# Altium PCB R100.230.040.001-00 Filtr1.PcbDoc
Units mm, origin at the board's own origin, x right, y up, seen from the top; angles counter-clockwise.
Board outline 163 x 157 mm, 2 copper layers (Top, Bottom), stack 2.14 mm thick; 16 components, 6 nets, 50 pads, 528 vias.
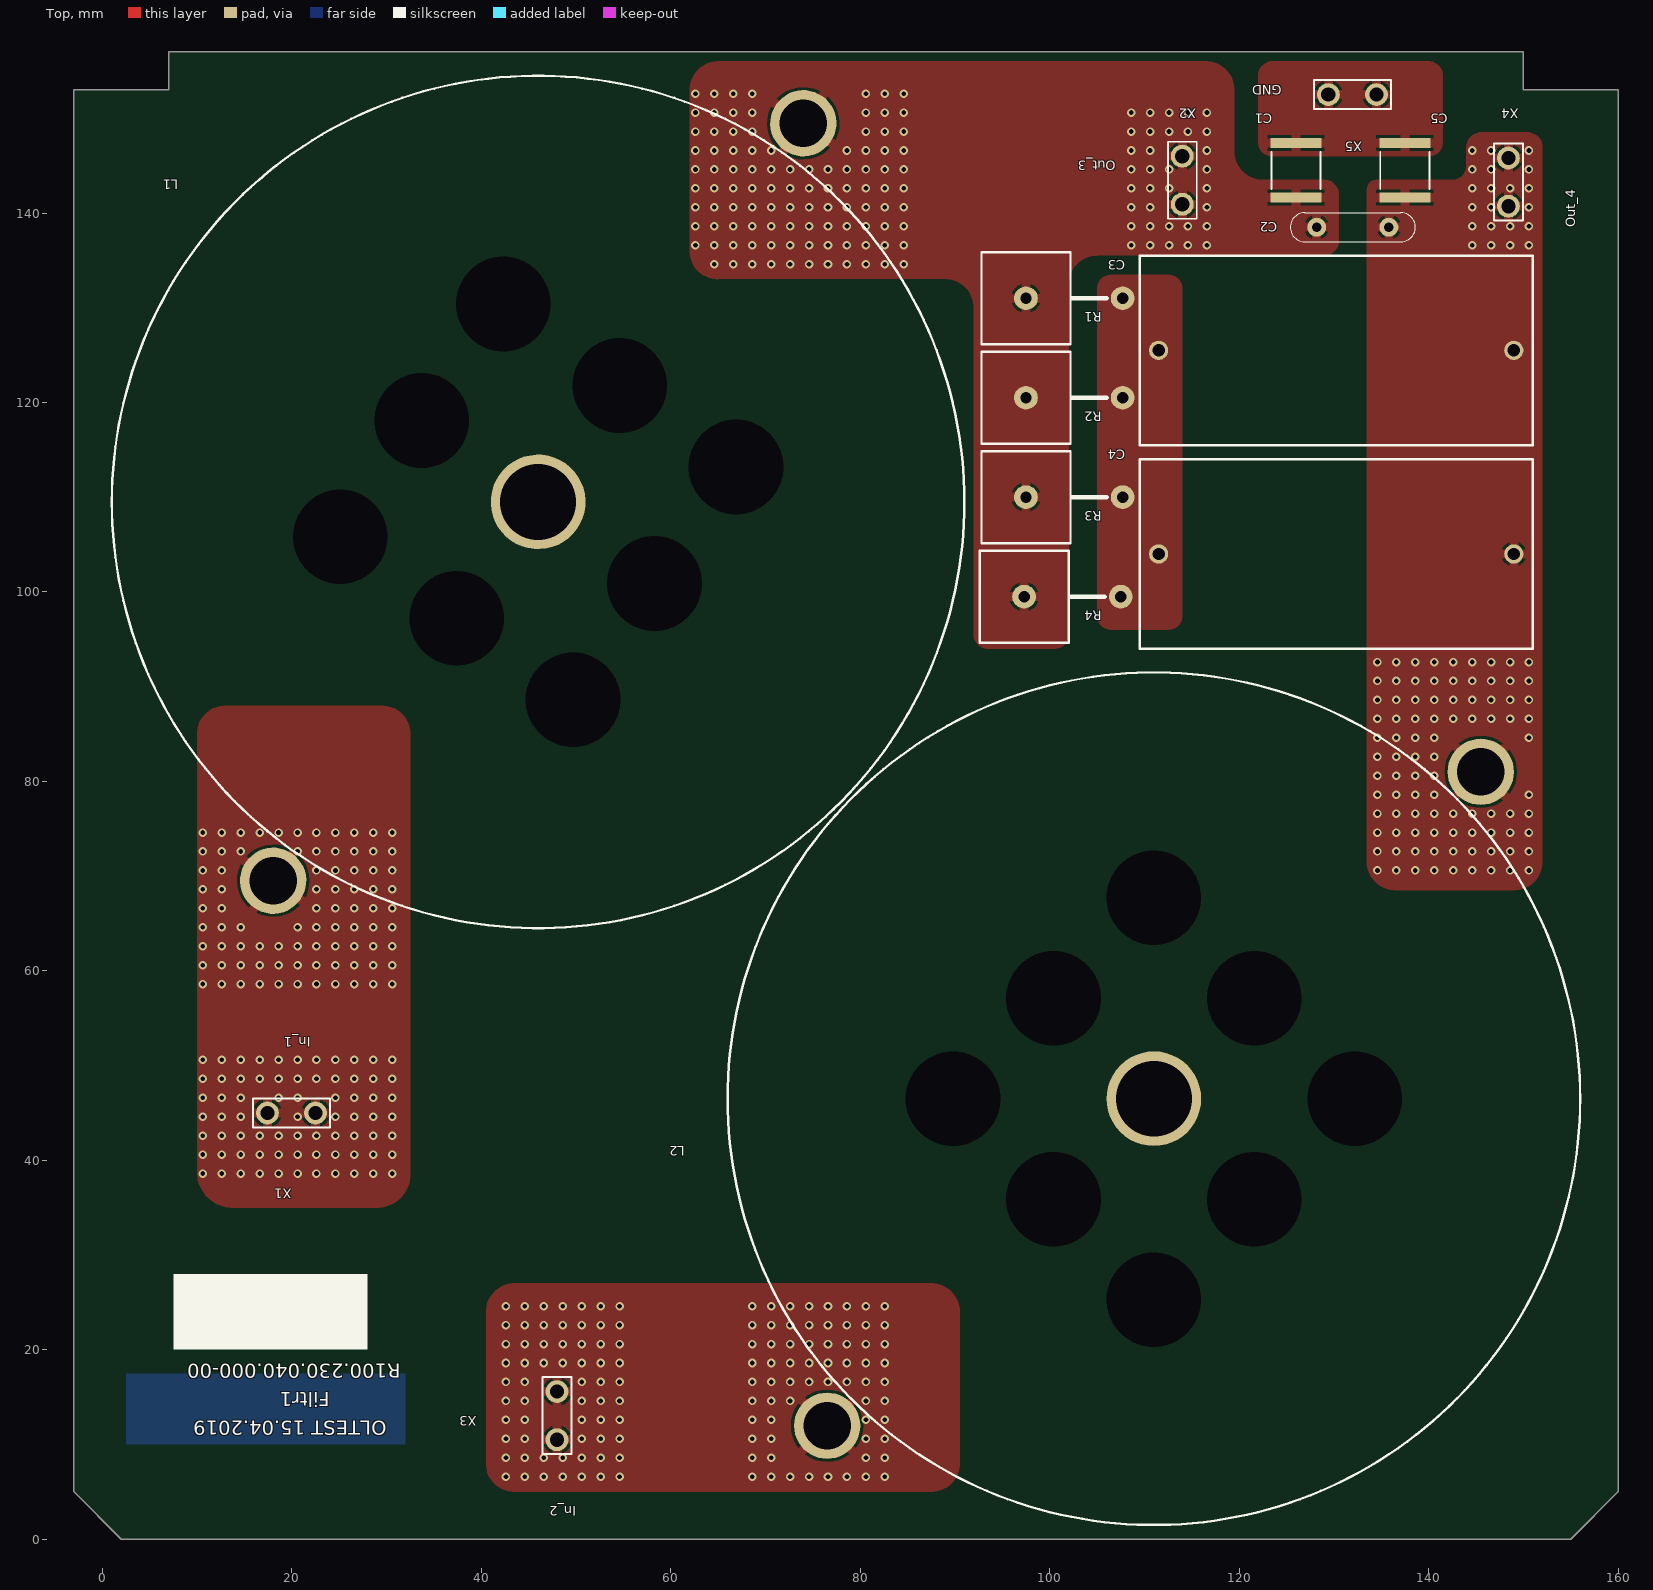
[diagram p0: Top view]
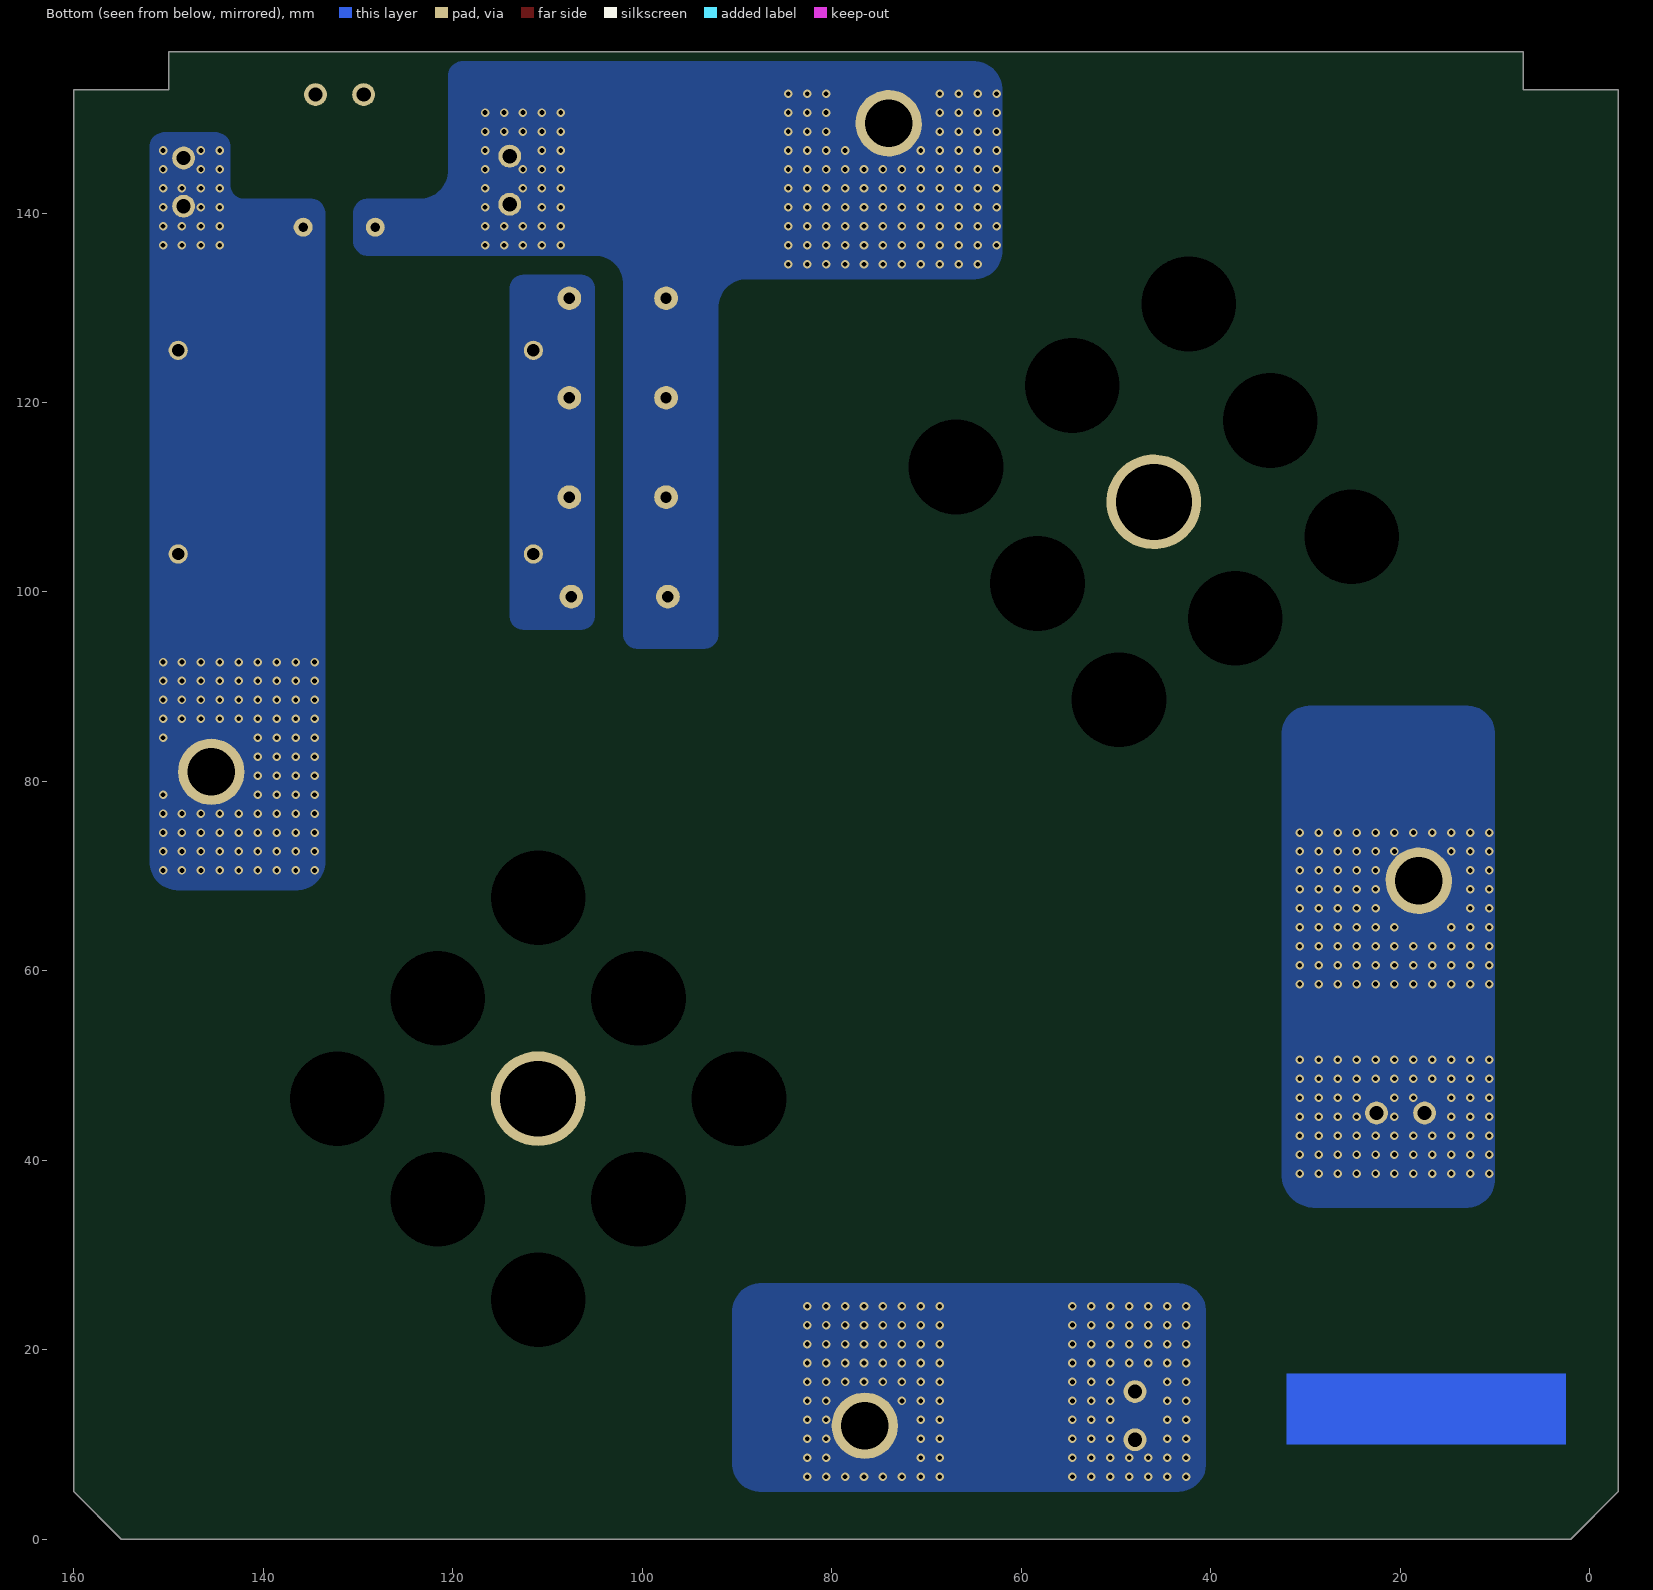
[diagram p1: Bottom view, seen from below]
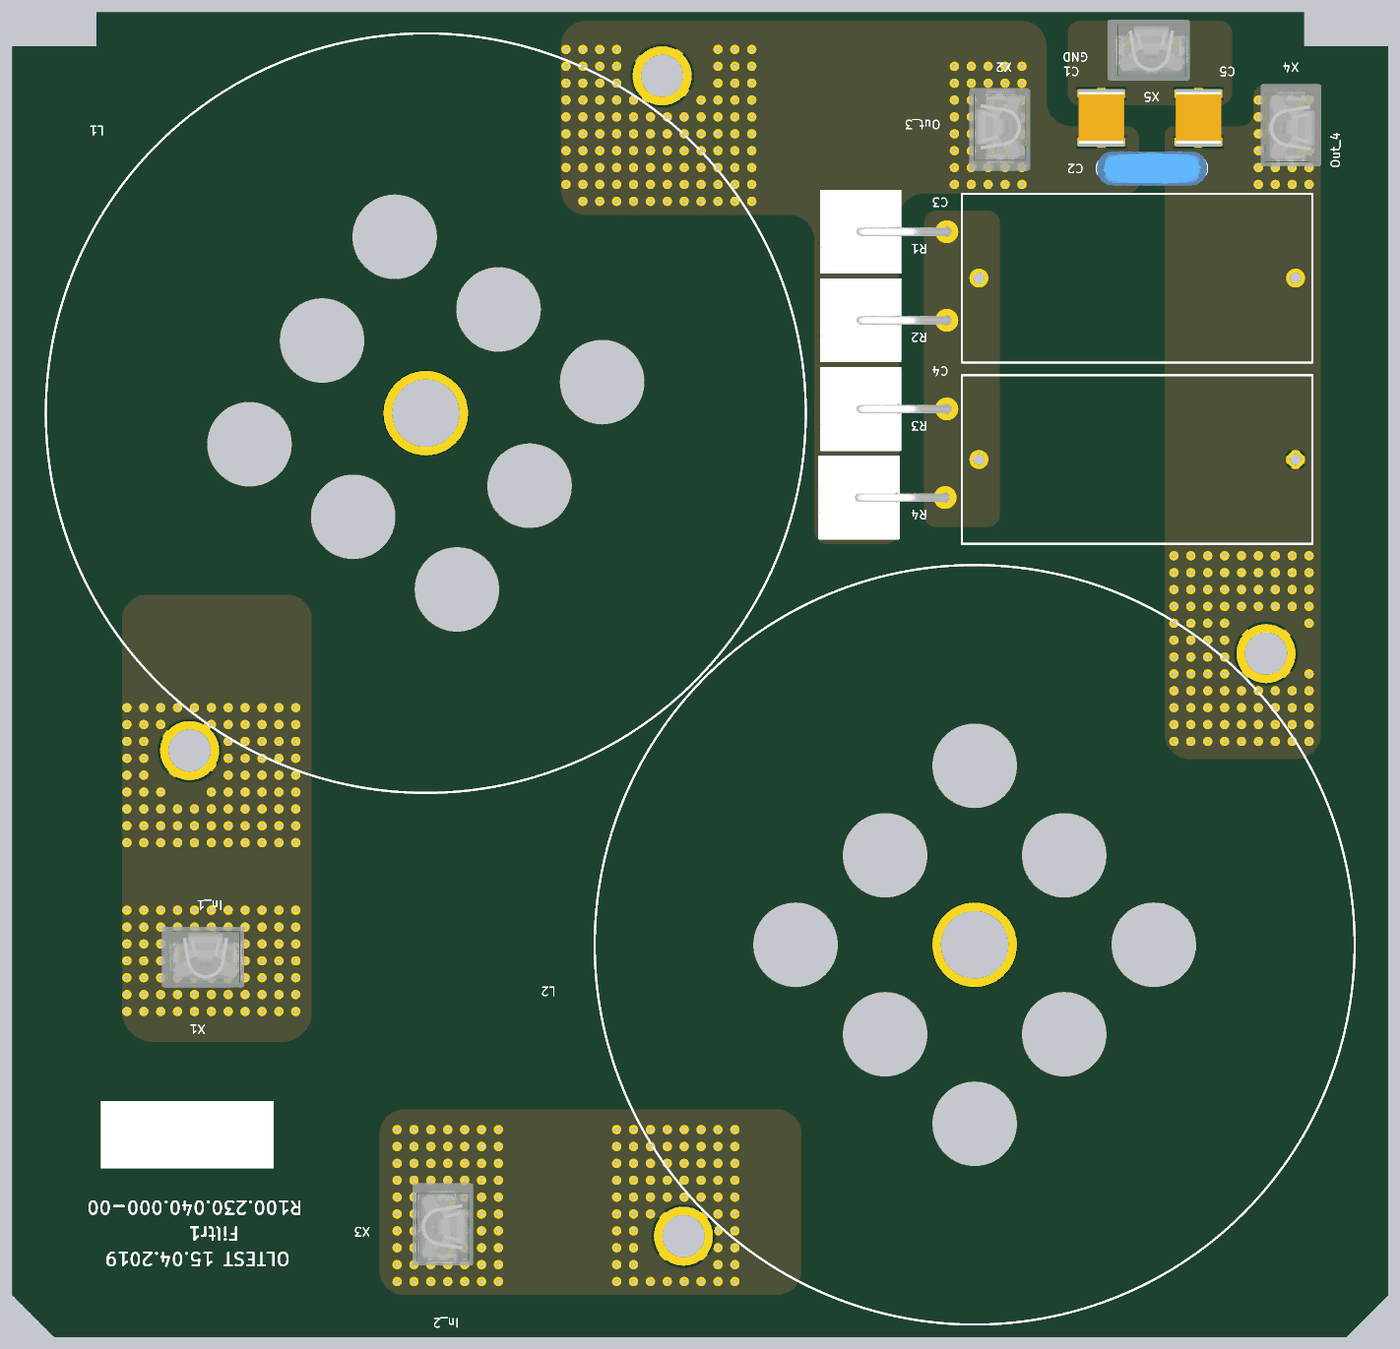
[diagram p2: 3D render of the assembled board from above, using the file's embedded part models]

## Layer stack, top to bottom
Top Solder: solder mask 0.0102, Solder Resist, Dk 3.5
Top: signal copper 0.07
Dielectric 1: dielectric 2, FR-4, Dk 4.8
Bottom: signal copper 0.07
Bottom Solder: solder mask 0.0102, Solder Resist, Dk 3.5

## Board outline
2,0 -3,5 -3,153 7,153 7,157 150,157 150,153 160,153 160,5 155,0

## Design rules (kind name [scope] priority, off if disabled: settings)
BoardOutlineClearance [All] p1: gap=0.5
Clearance Clearance_1 [(ObjectKind = 'Pad') And (Component = 'R10') And (Name = 'R10-2') vs InNet('VOUT-')] p1: gap=0.3
Clearance Clearance_Vout+- [InNet('VOUT+') or InNet('VOUT-')] p2: gap=1
Clearance Clearance_VOUT+-_4_+-Vin [InNet('VOUT+_4') or InNet('VOUT-_4') vs InNet('-VIN_200') or InNet('+VIN_200')] p3: gap=2
Clearance Clearance_VOUT+_4_VOUT-_4 [InNet('VOUT+_4') vs InNet('VOUT-_4')] p4: gap=2
Clearance Clearance_Vout_all [InNet('VOUT+_4') or InNet('VOUT-_4') or  InNet('VOUT+_3') or InNet('VOUT-_3') or InNet('VOUT+_2') or InNet('VOUT-_2') or InNet('VOUT+_1') or InNet('VOUT-_1') or InNet('VOUT+') or InNet('VOUT-')] p5: gap=1.2
Clearance Clearance_xp3_xp2_-Vin_200 [((ObjectKind = 'Pad') And (Component = 'XP3') And (Name = 'XP3-5')) or ((ObjectKind = 'Pad') And (Component = 'XP2') And (Name = 'XP2-5')) vs InNet('-VIN_200')] p6: gap=0.5
Clearance Clearance_+Vin_200_-Vin_200 [InNet('+VIN_200') vs InNet('-VIN_200')] p7: gap=2.2
Clearance Clearance_-Vin_200_All [InNet('-VIN_200') or InNet('+VIN_200')] p8: gap=1.2
Clearance [All] p9: gap=0.3 except(0.4: Arc-Poly Track-Poly SMDPad-Poly THPad-Poly Via-Poly Fill-Poly Poly-Poly)
ComponentClearance ComponentClearance_HS1 [(ObjectKind = 'Component') And (Name = 'HS1') or     (ObjectKind = 'Component') And (Name = 'HS2') or     (ObjectKind = 'Component') And (Name = 'HS3') or     (ObjectKind = 'Component') And (Name = 'HS4')] p1: gap=0.1 collisioncheckmode=3 verticalgap=0.1 showdistances=FALSE
ComponentClearance [All] p2: gap=0.254 collisioncheckmode=3 verticalgap=0.254 showdistances=FALSE
Height [All] p1: minheight=0 maxheight=63.5 prefheight=12.7
HoleSize [All] p1: absolutevalues=TRUE maxlimit=10 minlimit=0.5 maxpercent=80.000 minpercent=20.000
MinimumAnnularRing [All] p1: minimumring=0.2
PolygonConnect PolygonConnect_shunt [(ObjectKind = 'Pad') And (Component = 'R10') And (Name = 'R10-1') or (ObjectKind = 'Pad') And (Component = 'R10') And (Name = 'R10-3')] p1: connectstyle=Direct reliefconductorwidth=0.254 reliefentries=4 polygonreliefangle="90 Angle" airgapwidth=0.254
PolygonConnect PolygonConnect_snnaber [((ObjectKind = 'Pad') And (Component = 'C3') And (Name = 'C3-2'))  or (ObjectKind = 'Poly') And (Net = 'NetC3_1')  or (ObjectKind = 'Pad') And (Component = 'R2') And (Name = 'R2-1')  or (ObjectKind = 'Pad') And (Component = 'VD2') And (Name = 'VD2-2')  or(ObjectKind = 'Pad') And (Component = 'C29') And (Name = 'C29-2') or (ObjectKind = 'Poly') And (Net = 'NetC29_1') or (ObjectKind = 'Pad') And (Component = 'VD6') And (Name = 'VD6-2') or (ObjectKind = 'Pad') And (Component = 'R8') And (Name = 'R8-1') or (ObjectKind = 'Poly') And (Net = 'N2') And (Name = 'Top Overlay-No Net')] p2: connectstyle=Direct reliefconductorwidth=0.254 reliefentries=4 polygonreliefangle="90 Angle" airgapwidth=0.254
PolygonConnect PolygonConnect_1 [IsStitchingVia] p3: connectstyle=Direct reliefconductorwidth=0.254 reliefentries=4 polygonreliefangle="90 Angle" airgapwidth=0.254
PolygonConnect PolygonConnect_bottom_fill [OnLayer('Bottom')] p4: connectstyle=Direct reliefconductorwidth=0.254 reliefentries=4 polygonreliefangle="90 Angle" airgapwidth=0.254
PolygonConnect PoligonConnect_top [OnLayer('Top')] p5: connectstyle=Relief reliefconductorwidth=1 reliefentries=4 polygonreliefangle="90 Angle" airgapwidth=0.3
RoutingVias [All] p1: holewidth=0.7 width=1.2 viastyle="Through Hole" minholewidth=0.5 minwidth=0.9 maxholewidth=10 maxwidth=7.62
SolderMaskExpansion [All] p1: expansion=0.102
Width Width_+Vin_200 [InNet('+VIN_200')] p1: maxlimit=50 minlimit=0.762 preferedwidth=10 checkconnectedcopper=TRUE
Width [InNet('No Net')] p2: maxlimit=0.254 minlimit=0.254 preferedwidth=0.254
27 further rules are at their usual default settings.

## Components (designator, comment, footprint, x,y, rotation, side; value= is the part's Value field where it differs from the comment)
C1 "4700pF X1/Y2" SMD_C_2220 126,144.5 r270 top
C2 "10nF 300V" "C Y2 D13 7.5B" 132,138.5 r180 top
C3 "2.2uF 600VDC" MKP_W20_H39.5_L41.5_LS37.5 111.5,125.5 r0 top
C4 "2.2uF 600VDC" MKP_W20_H39.5_L41.5_LS37.5 149,104 r180 top
C5 "4700pF X1/Y2" SMD_C_2220 137.5,144.5 r90 top
L1 "900/450uH 30A" "DROSS (900/450 UH) R100230.041.000" 46,109.5 r55 top
L2 "900/450uH 30A" "DROSS (900/450 UH) R100230.041.000" 111,46.5 r45 top
R1 "1" "PRW 5W VERTICAL" 97.5,131 r0 top
R2 "1" "PRW 5W VERTICAL" 97.5,120.5 r0 top
R3 "1" "PRW 5W VERTICAL" 97.5,110 r0 top
R4 "1" "PRW 5W VERTICAL" 97.3,99.5 r0 top
X1 "63849-1" 63849-1+INSULATOR(154719-1) 17.42,45 r0 top
X2 "63849-1" 63849-1+INSULATOR(154719-1) 114,140.92 r90 top
X3 "63849-1" 63849-1+INSULATOR(154719-1) 48,15.58 r270 top
X4 "63849-1" 63849-1+INSULATOR(154719-1) 148.423,145.8 r270 top
X5 "63849-1" 63849-1+INSULATOR(154719-1) 129.42,152.5 r0 top

## Footprints (in the part's own frame and the unit in brackets; to place one, negate y for a bottom-side part, rotate by r counter-clockwise, add the part's x,y. Pads: shape width x height; smd on the part's side, far side on the other; paste and mask are expansions set on the pad)
63849-1+INSULATOR(154719-1) [mil]
  round 95 hole 59.06: 1(0,0) 2(200,0)
  silkscreen extent -60,-60 260,60, body extent -106,-141 279,142, height 955
"C Y2 D13 7.5B" [mm]
  round 2 hole 1: 1(-3.81,0) 2(3.81,0)
  silkscreen extent -6.6,-1.52 6.6,1.52, body extent -6.49,-2 6.49,2, height 15.5
"DROSS (900/450 UH) R100230.041.000" [mm]
  round 0 hole 10: 0(-15,15) 0(-15,0) 0(-15,-15) 0(0,-15) 0(0,15) 0(15,15) 0(15,0) 0(15,-15)
  round 7 hole 5: 1(-48.8,-0.025) 2(48.8,0)
  round 10 hole 8: 3(0,0)
  silkscreen extent -45,-45 45,45, body extent -45,-45.11 45.2,45.21, height 52
MKP_W20_H39.5_L41.5_LS37.5 [mil]
  round 80 hole 51.18: 1(0,0) 2(1476.38,0)
  silkscreen extent -79,-394 1555,394, body extent -84,-399 1560,399, height 1555
"PRW 5W VERTICAL" [mm]
  round 2.5 hole 1.2: 1(0,0) 2(10.2,0)
  silkscreen extent -4.7,-4.85 8.5,4.85, body extent -4.7,-4.85 10.66,4.85, height 24.3
SMD_C_2220 [mm]
  rect 1.05x5.4 smd: 1(-2.875,0) 2(2.875,0)
  silkscreen extent -1.95,-2.6 1.95,2.6, body extent -3.05,-2.7 3.05,2.7, height 2

## Part data
C1 C5: library part "C X1Y2 4700pF SMD 2220 250Vac 10%", "SMD C2220 MURATA 250Vac 10% X7R X1Y2"
C2: library part "C X1Y2 10nF D13 LS7.5", "Ceramic D=14 LS=7.5 300VAC X1Y2"
C3 C4: library part "MKP1 2.2uF 10% 600VDC", "Polypropelene W20 H39.5 L41.5 LS37.5 600VDC 10%"
L1 L2: library part "Dross 900/450uH 30A R100.230.041.000", "1000/250uH 30A  (Core CK40090 X2)"
R1 R2 R3 R4: library part "PRW 1 5W +-5%_1", "Выводной PRW 5W 1R +-5%"
X1 X2 X3 X4 X5: "PCB, 6.3х0.8, hole"

## Via types
v1: diameter 0.9, hole 0.5, Top to Bottom, 528 vias

## Nets (pads, with @x,y where several pads share a name; then routed paths per layer and width w, separated by ;. In a path a pad name is that pad's centre, name@x,y a point inside that pad or via, vN(x,y) a via of type N, cw(c..) or ccw(c..) an arc to the next point about the centre after c; other vN are vias at no path point)
GND: C1.1 C5.2 X5.1 X5.2
NetC1_2: C1.2 C2.2 L1.2 R1.1 R2.1 R3.1 R4.1 X2.1 X2.2
  other v1: 64.6,134.6 66.6,134.6 68.6,134.6 70.6,134.6 72.6,134.6 74.6,134.6 76.6,134.6 78.6,134.6 80.6,134.6 82.6,134.6 84.6,134.6 62.6,136.6 64.6,136.6 66.6,136.6 68.6,136.6 70.6,136.6 72.6,136.6 74.6,136.6 76.6,136.6 78.6,136.6 80.6,136.6 82.6,136.6 84.6,136.6 108.6,136.6 110.6,136.6 112.6,136.6 114.6,136.6 116.6,136.6 62.6,138.6 64.6,138.6 66.6,138.6 68.6,138.6 70.6,138.6 72.6,138.6 74.6,138.6 76.6,138.6 78.6,138.6 80.6,138.6 82.6,138.6 84.6,138.6 108.6,138.6 110.6,138.6 112.6,138.6 114.6,138.6 116.6,138.6 62.6,140.6 64.6,140.6 66.6,140.6 68.6,140.6 70.6,140.6 72.6,140.6 74.6,140.6 76.6,140.6 78.6,140.6 80.6,140.6 82.6,140.6 84.6,140.6 108.6,140.6 110.6,140.6 116.6,140.6 62.6,142.6 64.6,142.6 66.6,142.6 68.6,142.6 70.6,142.6 72.6,142.6 74.6,142.6 76.6,142.6 78.6,142.6 80.6,142.6 82.6,142.6 84.6,142.6 108.6,142.6 110.6,142.6 112.6,142.6 116.6,142.6 62.6,144.6 64.6,144.6 66.6,144.6 68.6,144.6 70.6,144.6 72.6,144.6 74.6,144.6 76.6,144.6 78.6,144.6 80.6,144.6 82.6,144.6 84.6,144.6 108.6,144.6 110.6,144.6 112.6,144.6 116.6,144.6 62.6,146.6 64.6,146.6 66.6,146.6 68.6,146.6 70.6,146.6 78.6,146.6 80.6,146.6 82.6,146.6 84.6,146.6 108.6,146.6 110.6,146.6 116.6,146.6 62.6,148.6 64.6,148.6 66.6,148.6 68.6,148.6 80.6,148.6 82.6,148.6 84.6,148.6 108.6,148.6 110.6,148.6 112.6,148.6 114.6,148.6 116.6,148.6 62.6,150.6 64.6,150.6 66.6,150.6 68.6,150.6 80.6,150.6 82.6,150.6 84.6,150.6 108.6,150.6 110.6,150.6 112.6,150.6 114.6,150.6 116.6,150.6 62.6,152.6 64.6,152.6 66.6,152.6 68.6,152.6 80.6,152.6 82.6,152.6 84.6,152.6
NetC2_1: C2.1 C3.2 C4.1 C5.1 L2.2 X4.1 X4.2
  other v1: 134.6,70.6 136.6,70.6 138.6,70.6 140.6,70.6 142.6,70.6 144.6,70.6 146.6,70.6 148.6,70.6 150.6,70.6 134.6,72.6 136.6,72.6 138.6,72.6 140.6,72.6 142.6,72.6 144.6,72.6 146.6,72.6 148.6,72.6 150.6,72.6 134.6,74.6 136.6,74.6 138.6,74.6 140.6,74.6 142.6,74.6 144.6,74.6 146.6,74.6 148.6,74.6 150.6,74.6 134.6,76.6 136.6,76.6 138.6,76.6 140.6,76.6 142.6,76.6 144.6,76.6 146.6,76.6 148.6,76.6 150.6,76.6 134.6,78.6 136.6,78.6 138.6,78.6 140.6,78.6 150.6,78.6 134.6,80.6 136.6,80.6 138.6,80.6 140.6,80.6 134.6,82.6 136.6,82.6 138.6,82.6 140.6,82.6 134.6,84.6 136.6,84.6 138.6,84.6 140.6,84.6 150.6,84.6 134.6,86.6 136.6,86.6 138.6,86.6 140.6,86.6 142.6,86.6 144.6,86.6 146.6,86.6 148.6,86.6 150.6,86.6 134.6,88.6 136.6,88.6 138.6,88.6 140.6,88.6 142.6,88.6 144.6,88.6 146.6,88.6 148.6,88.6 150.6,88.6 134.6,90.6 136.6,90.6 138.6,90.6 140.6,90.6 142.6,90.6 144.6,90.6 146.6,90.6 148.6,90.6 150.6,90.6 134.6,92.6 136.6,92.6 138.6,92.6 140.6,92.6 142.6,92.6 144.6,92.6 146.6,92.6 148.6,92.6 150.6,92.6 144.6,136.6 146.6,136.6 148.6,136.6 150.6,136.6 144.6,138.6 146.6,138.6 148.6,138.6 150.6,138.6 144.6,140.6 146.6,140.6 150.6,140.6 144.6,142.6 146.6,142.6 148.6,142.6 150.6,142.6 144.6,144.6 146.6,144.6 150.6,144.6 144.6,146.6 146.6,146.6 150.6,146.6
NetC3_1: C3.1 C4.2 R1.2 R2.2 R3.2 R4.2
NetL1_1: L1.1 X1.1 X1.2
  other v1: 10.6,38.6 12.6,38.6 14.6,38.6 16.6,38.6 18.6,38.6 20.6,38.6 22.6,38.6 24.6,38.6 26.6,38.6 28.6,38.6 30.6,38.6 10.6,40.6 12.6,40.6 14.6,40.6 16.6,40.6 18.6,40.6 20.6,40.6 22.6,40.6 24.6,40.6 26.6,40.6 28.6,40.6 30.6,40.6 10.6,42.6 12.6,42.6 14.6,42.6 16.6,42.6 18.6,42.6 20.6,42.6 22.6,42.6 24.6,42.6 26.6,42.6 28.6,42.6 30.6,42.6 10.6,44.6 12.6,44.6 14.6,44.6 20.6,44.6 24.6,44.6 26.6,44.6 28.6,44.6 30.6,44.6 10.6,46.6 12.6,46.6 14.6,46.6 18.6,46.6 20.6,46.6 24.6,46.6 26.6,46.6 28.6,46.6 30.6,46.6 10.6,48.6 12.6,48.6 14.6,48.6 16.6,48.6 18.6,48.6 20.6,48.6 22.6,48.6 24.6,48.6 26.6,48.6 28.6,48.6 30.6,48.6 10.6,50.6 12.6,50.6 14.6,50.6 16.6,50.6 18.6,50.6 20.6,50.6 22.6,50.6 24.6,50.6 26.6,50.6 28.6,50.6 30.6,50.6 10.6,58.6 12.6,58.6 14.6,58.6 16.6,58.6 18.6,58.6 20.6,58.6 22.6,58.6 24.6,58.6 26.6,58.6 28.6,58.6 30.6,58.6 10.6,60.6 12.6,60.6 14.6,60.6 16.6,60.6 18.6,60.6 20.6,60.6 22.6,60.6 24.6,60.6 26.6,60.6 28.6,60.6 30.6,60.6 10.6,62.6 12.6,62.6 14.6,62.6 16.6,62.6 18.6,62.6 20.6,62.6 22.6,62.6 24.6,62.6 26.6,62.6 28.6,62.6 30.6,62.6 10.6,64.6 12.6,64.6 14.6,64.6 20.6,64.6 22.6,64.6 24.6,64.6 26.6,64.6 28.6,64.6 30.6,64.6 10.6,66.6 12.6,66.6 22.6,66.6 24.6,66.6 26.6,66.6 28.6,66.6 30.6,66.6 10.6,68.6 12.6,68.6 22.6,68.6 24.6,68.6 26.6,68.6 28.6,68.6 30.6,68.6 10.6,70.6 12.6,70.6 22.6,70.6 24.6,70.6 26.6,70.6 28.6,70.6 30.6,70.6 10.6,72.6 12.6,72.6 14.6,72.6 20.6,72.6 22.6,72.6 24.6,72.6 26.6,72.6 28.6,72.6 30.6,72.6 10.6,74.6 12.6,74.6 14.6,74.6 16.6,74.6 18.6,74.6 20.6,74.6 22.6,74.6 24.6,74.6 26.6,74.6 28.6,74.6 30.6,74.6
NetL2_1: L2.1 X3.1 X3.2
  other v1: 42.6,6.6 44.6,6.6 46.6,6.6 48.6,6.6 50.6,6.6 52.6,6.6 54.6,6.6 68.6,6.6 70.6,6.6 72.6,6.6 74.6,6.6 76.6,6.6 78.6,6.6 80.6,6.6 82.6,6.6 42.6,8.6 44.6,8.6 46.6,8.6 48.6,8.6 50.6,8.6 52.6,8.6 54.6,8.6 68.6,8.6 70.6,8.6 80.6,8.6 82.6,8.6 42.6,10.6 44.6,10.6 50.6,10.6 52.6,10.6 54.6,10.6 68.6,10.6 70.6,10.6 80.6,10.6 82.6,10.6 42.6,12.6 44.6,12.6 50.6,12.6 52.6,12.6 54.6,12.6 68.6,12.6 70.6,12.6 80.6,12.6 82.6,12.6 42.6,14.6 44.6,14.6 50.6,14.6 52.6,14.6 54.6,14.6 68.6,14.6 70.6,14.6 72.6,14.6 80.6,14.6 82.6,14.6 42.6,16.6 44.6,16.6 50.6,16.6 52.6,16.6 54.6,16.6 68.6,16.6 70.6,16.6 72.6,16.6 74.6,16.6 76.6,16.6 78.6,16.6 80.6,16.6 82.6,16.6 42.6,18.6 44.6,18.6 46.6,18.6 48.6,18.6 50.6,18.6 52.6,18.6 54.6,18.6 68.6,18.6 70.6,18.6 72.6,18.6 74.6,18.6 76.6,18.6 78.6,18.6 80.6,18.6 82.6,18.6 42.6,20.6 44.6,20.6 46.6,20.6 48.6,20.6 50.6,20.6 52.6,20.6 54.6,20.6 68.6,20.6 70.6,20.6 72.6,20.6 74.6,20.6 76.6,20.6 78.6,20.6 80.6,20.6 82.6,20.6 42.6,22.6 44.6,22.6 46.6,22.6 48.6,22.6 50.6,22.6 52.6,22.6 54.6,22.6 68.6,22.6 70.6,22.6 72.6,22.6 74.6,22.6 76.6,22.6 78.6,22.6 80.6,22.6 82.6,22.6 42.6,24.6 44.6,24.6 46.6,24.6 48.6,24.6 50.6,24.6 52.6,24.6 54.6,24.6 68.6,24.6 70.6,24.6 72.6,24.6 74.6,24.6 76.6,24.6 78.6,24.6 80.6,24.6 82.6,24.6
pads on no net: L1.0 L1.3 L2.0 L2.3

## Polygon pours and split planes (outlines as drawn)
NetL1_1 on Top "NetL1_1" (solid, pour order 0): 10,85 10,38.75 ccw(c13.75,38.75) 13.75,35 29,35 ccw(c29,38.5) 32.5,38.5 32.5,85 ccw(c29.5,85) 29.5,88 13,88 ccw(c13,85)
NetL2_1 on Top "NetL2_1" (solid, pour order 2): 43.5,5 87.5,5 ccw(c87.5,8) 90.5,8 90.5,24 ccw(c87.5,24) 87.5,27 43.5,27 ccw(c43.5,24) 40.5,24 40.5,8 ccw(c43.5,8)
NetC3_1 on Top "NetL3_1" (solid, pour order 12): 106.5,133.5 112.5,133.5 cw(c112.5,132) 114,132 114,97.5 cw(c112.5,97.5) 112.5,96 106.5,96 cw(c106.5,97.5) 105,97.5 105,132 cw(c106.5,132)
NetC2_1 on Top "NetL2_1" (solid, pour order 20): 133.5,142.5 133.5,71.5 ccw(c136.5,71.5) 136.5,68.5 149,68.5 ccw(c149,71.5) 152,71.5 152,143.5 152,147 ccw(c150.5,147) 150.5,148.5 145.5,148.5 ccw(c145.5,147) 144,147 144,145 cw(c142.5,145) 142.5,143.5 134.5,143.5 ccw(c134.5,142.5)
GND on Top "GND_SINK" (solid, pour order 22): 122,154.5 122,147.5 ccw(c123.5,147.5) 123.5,146 140,146 ccw(c140,147.5) 141.5,147.5 141.5,154.5 ccw(c140,154.5) 140,156 123.5,156 ccw(c123.5,154.5)
NetC1_2 on Top "NetL1_2" (solid, pour order 16): 62,153 62,136 ccw(c65,136) 65,133 89,133 cw(c89,130) 92,130 92,95.5 ccw(c93.5,95.5) 93.5,94 100.5,94 ccw(c100.5,95.5) 102,95.5 102,132.5 cw(c105,132.5) 105,135.5 129,135.5 ccw(c129,137) 130.5,137 130.5,142 ccw(c129,142) 129,143.5 122.5,143.5 cw(c122.5,146.5) 119.5,146.5 119.5,153 ccw(c116.5,153) 116.5,156 65,156 ccw(c65,153)
NetL1_1 on Bottom "NetL1_1" (solid, pour order 1): 10,38 10,85 cw(c13,85) 13,88 29.5,88 cw(c29.5,85) 32.5,85 32.5,38.5 cw(c29,38.5) 29,35 13,35 cw(c13,38)
NetL2_1 on Bottom "NetL2_1" (solid, pour order 4): 40.5,24 40.5,8 ccw(c43.5,8) 43.5,5 87.5,5 ccw(c87.5,8) 90.5,8 90.5,24 ccw(c87.5,24) 87.5,27 43.5,27 ccw(c43.5,24)
NetC3_1 on Bottom "NetL3_1" (solid, pour order 10): 105,132 105,97.5 ccw(c106.5,97.5) 106.5,96 112.5,96 ccw(c112.5,97.5) 114,97.5 114,132 ccw(c112.5,132) 112.5,133.5 106.5,133.5 ccw(c106.5,132)
NetC1_2 on Bottom "NetL1_2" (solid, pour order 14): 62,153 62,136 ccw(c65,136) 65,133 89,133 cw(c89,130) 92,130 92,95.5 ccw(c93.5,95.5) 93.5,94 100.5,94 ccw(c100.5,95.5) 102,95.5 102,132.5 cw(c105,132.5) 105,135.5 123.5,135.5 129,135.5 ccw(c129,137) 130.5,137 130.5,140 ccw(c129,140) 129,141.5 123.5,141.5 cw(c123.5,144.5) 120.5,144.5 120.5,154.5 ccw(c119,154.5) 119,156 65,156 ccw(c65,153)
NetC2_1 on Bottom "NetL2_1" (solid, pour order 18): 143.5,147 143.5,143 cw(c142,143) 142,141.5 135,141.5 ccw(c135,140) 133.5,140 133.5,71.5 ccw(c136.5,71.5) 136.5,68.5 149,68.5 ccw(c149,71.5) 152,71.5 152,147 ccw(c150.5,147) 150.5,148.5 145,148.5 ccw(c145,147)

## Other copper
Bottom:
  rectangle: 2.5,10 32,17.5

## Silkscreen, mask and mechanical layers (free items; w line width, h text height)
Top Overlay:
  rectangle: 7.5,20 28,28
  text "GND" at 124.5,153.5 h1 r180
  text "Out_3" at 107,145.5 h1 r180
  text "Out_4" at 155.5,138.5 h1 r90
  text "In_1" at 22,53 h1 r180
  text "R100.230.040.000-00" at 31.496,18.5 h1.5 r180
  text "Filtr1" at 24,15.5 h1.5 r180
  text "OLTEST 15.04.2019" at 30,12.5 h1.5 r180
  text "In_2" at 50,3.5 h1 r180
Bottom Solder:
  text "R100.230.040.001-00" at 2.811,17 h1.5 r180
  text "Filtr1" at 6,14 h1.5 r180
Board:
  the board outline again, w0.254